# EAGLE board sensro (EAGLE 7.7.0)
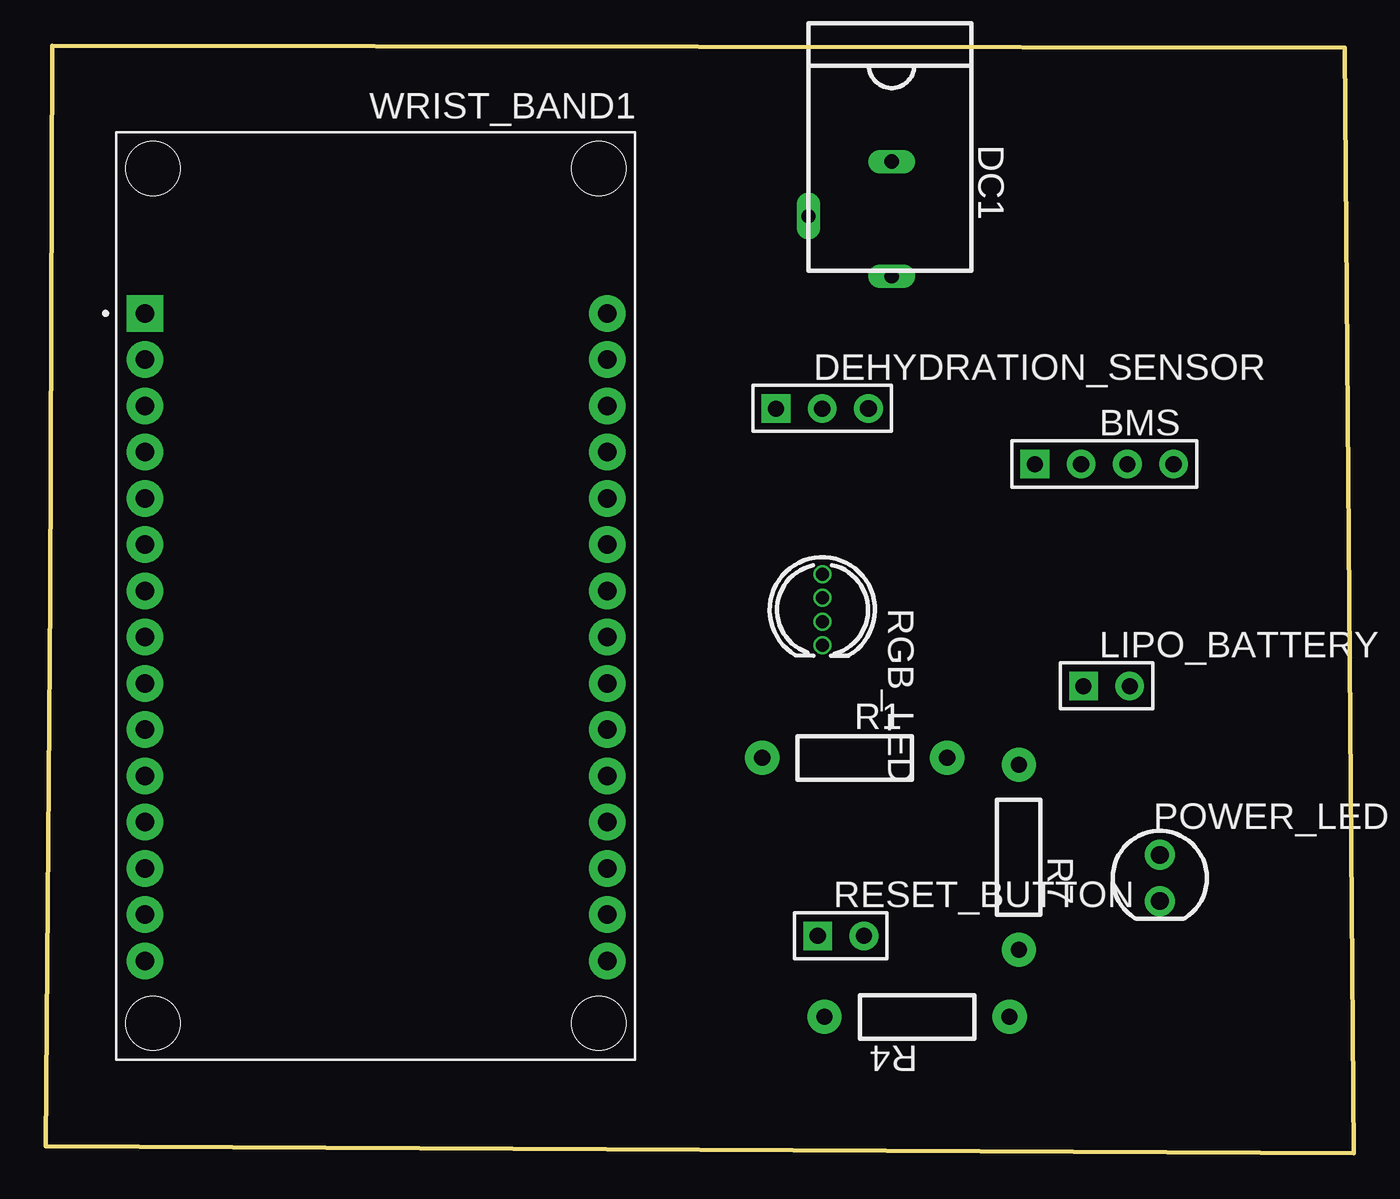
[diagram p0: board, top side]
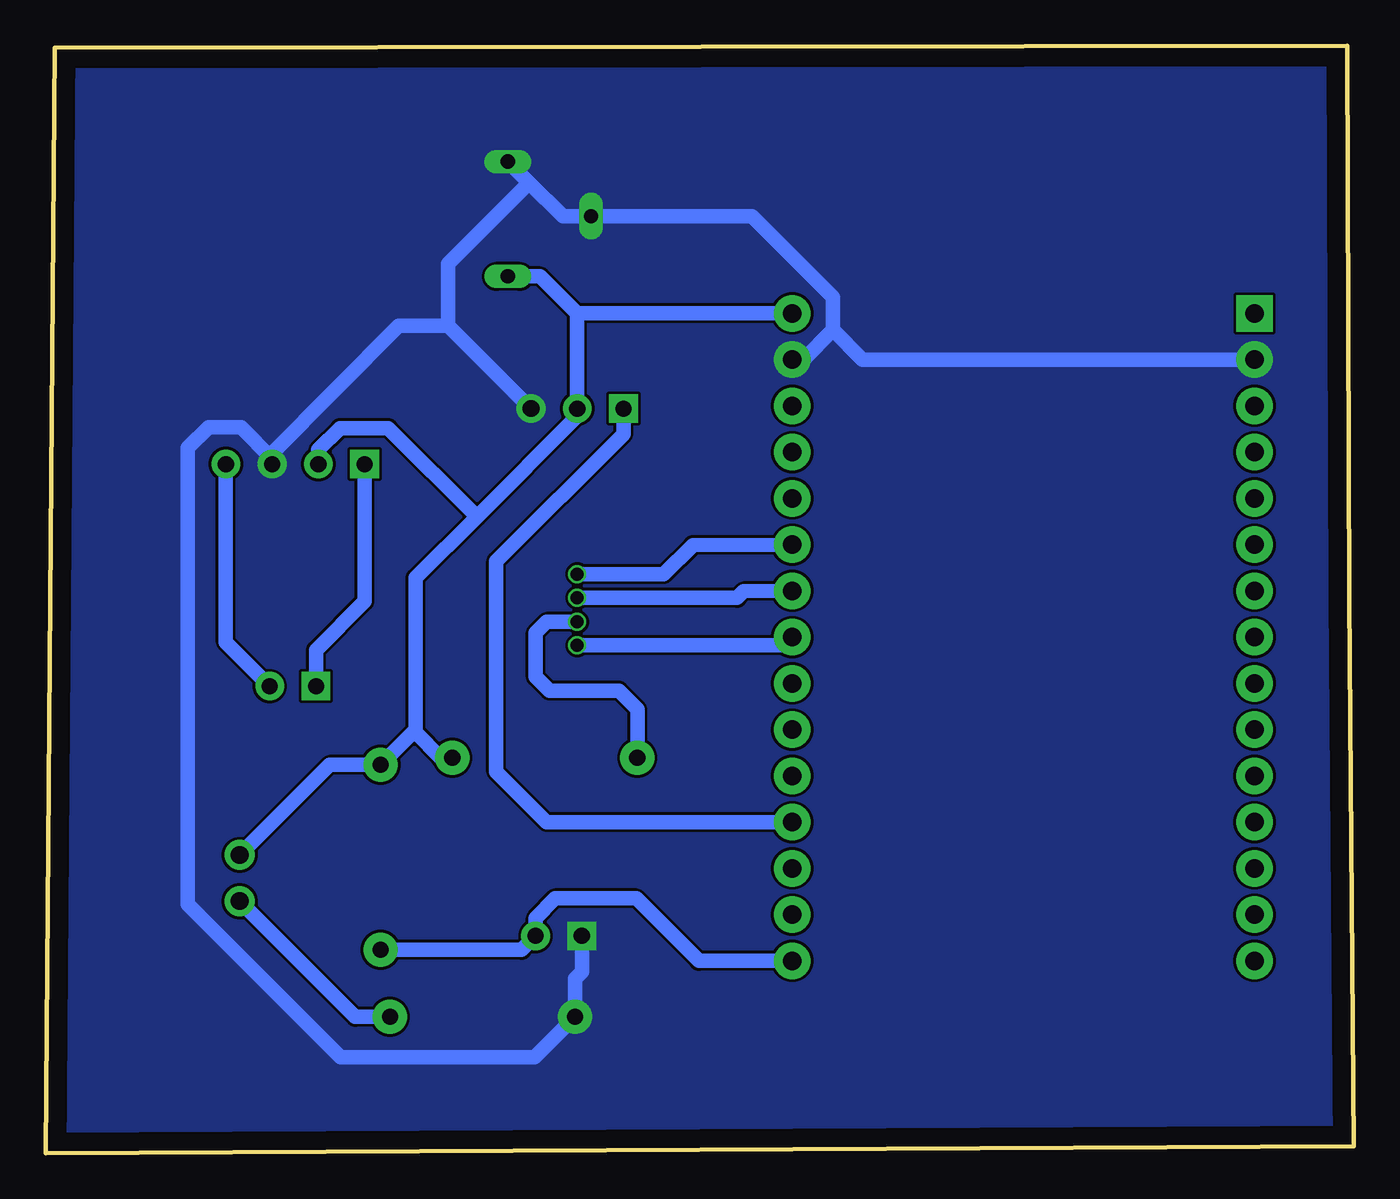
[diagram p1: board, bottom side, seen from below]

Size 71.88 x 60.83 mm. Coordinates in mm from the lower left corner, seen from the top.
Outline: 0.25,30.48 0.38,60.83 71.37,60.71 71.88,0 0,0.38 0.25,30.48
Copper layers (1*16): Top 0.035mm / dielectric 1.5mm / Bottom 0.035mm
Design rules "PCB_PCB_dehydration(sensor)_2023-07-20": minimum track width 6mil, minimum drill 0.35mm, track to track 6mil, track to pad 6mil, pad to pad 6mil, via to via 6mil, smd to smd 6mil, copper to edge 40mil, drill to drill 6mil, minimum pad ring 0mil, minimum via ring 0mil, stop-mask expansion 4mil, vias tented up to drill 0mil, thermal gap 10mil

## Footprints (pad centres in the part's own frame; a part is rotated, then mirrored left to right if it is on the bottom)
HDR-F-2.54_1X4_1PRIMARY = drill 0.889 pad 1.575 square: 1 -3.81,0 | drill 0.889 pad 1.575: 2 -1.27,0; 3 1.27,0; 4 3.81,0
DC-5020_1PRIMARY = drill 0.787 pad 1.295 long: 1 3.15,2.286; 2 -3.15,2.286; 3 -0.152,-2.286
HDR-F-2.54_1X3_1PRIMARY = drill 0.889 pad 1.575 square: 1 -2.54,0 | drill 0.889 pad 1.575: 2 0,0 | drill 0.914 pad 1.575: 3 2.54,0
HDR-F-2.54_1X2_1PRIMARY = drill 0.889 pad 1.575 square: 1 -1.27,0 | drill 0.889 pad 1.575: 2 1.27,0
LED-TH_BD5.0_BLUE_1PRIMARY = drill 0.965 pad 1.651: 1 0,1.27; 2 0,-1.27
R_AXIAL-0.4_1PRIMARY = drill 0.889 pad 1.88: 1 -5.08,0; 2 5.08,0
LED-TH_4P-BD5.8-P1.30_1PRIMARY = drill 0.711 pad 0.991: 1 1.956,0; 2 0.66,0; 3 -0.66,0; 4 -1.956,0
MODULE_ESP32_DEVKIT_V1_1PRIMARY = drill 1.016 pad 2.007 square: 1 -12.7,15.519 | drill 1.016 pad 2.007: 2 -12.7,12.979; 3 -12.7,10.439; 4 -12.7,7.899; 5 -12.7,5.359; 6 -12.7,2.819; 7 -12.7,0.279; 8 -12.7,-2.261; 9 -12.7,-4.801; 10 -12.7,-7.341; 11 -12.7,-9.881; 12 -12.7,-12.421; 13 -12.7,-14.961; 14 -12.7,-17.501; 15 -12.7,-20.041; 16 12.7,-20.041; 17 12.7,-17.501; 18 12.7,-14.961; 19 12.7,-12.421; 20 12.7,-9.881; 21 12.7,-7.341; 22 12.7,-4.801; 23 12.7,-2.261; 24 12.7,0.279; 25 12.7,2.819; 26 12.7,5.359; 27 12.7,7.899; 28 12.7,10.439; 29 12.7,12.979; 30 12.7,15.519

## Placement (x,y rotation side)
BMS  HDR-F-2.54_1x4  [HDR-F-2.54_1X4_1PRIMARY]  58.17,37.85 0 top
DC1  DC005-2.0MM  [DC-5020_1PRIMARY]  44.2,51.31 270 top
DEHYDRATION_SENSOR  HDR-F-2.54_1x3  [HDR-F-2.54_1X3_1PRIMARY]  42.67,40.89 0 top
LIPO_BATTERY  HDR-F-2.54_1x2  [HDR-F-2.54_1X2_1PRIMARY]  58.29,25.65 0 top
POWER_LED  LED-TH-5mm_B  [LED-TH_BD5.0_BLUE_1PRIMARY]  61.21,15.11 0 top
R1  220  [R_AXIAL-0.4_1PRIMARY]  44.45,21.72 0 top
R4  220  [R_AXIAL-0.4_1PRIMARY]  47.88,7.49 180 top
R7  10k  [R_AXIAL-0.4_1PRIMARY]  53.47,16.26 270 top
RESET_BUTTON  HDR-F-2.54_1x2  [HDR-F-2.54_1X2_1PRIMARY]  43.69,11.94 0 top
RGB_LED  f5_RGB_Transparent  [LED-TH_4P-BD5.8-P1.30_1PRIMARY]  42.67,29.84 270 top
WRIST_BAND1  ESP32-DEVKIT-V1  [MODULE_ESP32_DEVKIT_V1_1PRIMARY]  18.16,30.61 0 top

## Library data of the parts
BMS DC1 DEHYDRATION_SENSOR LIPO_BATTERY POWER_LED R1 R4 R7 RESET_BUTTON RGB_LED WRIST_BAND1 = PCB_PCB_dehydration(sensor)_2023-07-20

## Nets
3.7V: BMS.2 DC1.1 DEHYDRATION_SENSOR.2 POWER_LED.1 R1.2 R7.1 WRIST_BAND1.30
BMS_1: BMS.1 LIPO_BATTERY.1
BMS_4: BMS.4 LIPO_BATTERY.2
DEHYDRATION: DEHYDRATION_SENSOR.1 WRIST_BAND1.19
GND: BMS.3 DC1.2 DC1.3 DEHYDRATION_SENSOR.3 R4.2 RESET_BUTTON.1 WRIST_BAND1.2 WRIST_BAND1.29
OUTPUT_LED1: RGB_LED.1 WRIST_BAND1.23
OUTPUT_LED2: RGB_LED.3 WRIST_BAND1.24
OUTPUT_LED3: RGB_LED.4 WRIST_BAND1.25
POWER_LED_2: POWER_LED.2 R4.1
R1_1: R1.1 RGB_LED.2
RESET1: R7.2 RESET_BUTTON.2 WRIST_BAND1.16
WRIST_BAND1_1: WRIST_BAND1.1
WRIST_BAND1_3: WRIST_BAND1.3
WRIST_BAND1_4: WRIST_BAND1.4
WRIST_BAND1_5: WRIST_BAND1.5
WRIST_BAND1_6: WRIST_BAND1.6
WRIST_BAND1_7: WRIST_BAND1.7
WRIST_BAND1_8: WRIST_BAND1.8
WRIST_BAND1_9: WRIST_BAND1.9
WRIST_BAND1_10: WRIST_BAND1.10
WRIST_BAND1_11: WRIST_BAND1.11
WRIST_BAND1_12: WRIST_BAND1.12
WRIST_BAND1_13: WRIST_BAND1.13
WRIST_BAND1_14: WRIST_BAND1.14
WRIST_BAND1_15: WRIST_BAND1.15
WRIST_BAND1_17: WRIST_BAND1.17
WRIST_BAND1_18: WRIST_BAND1.18
WRIST_BAND1_20: WRIST_BAND1.20
WRIST_BAND1_21: WRIST_BAND1.21
WRIST_BAND1_22: WRIST_BAND1.22
WRIST_BAND1_26: WRIST_BAND1.26
WRIST_BAND1_27: WRIST_BAND1.27
WRIST_BAND1_28: WRIST_BAND1.28

## Tracks (layer width: path | path; a pad name or v marks a point on that pad's centre or on a via)
3.7V
  Bottom 0.8: 42.67,46.13 44.7,48.16 DC1.1 | 42.67,46.13 DEHYDRATION_SENSOR.2 42.67,40.49 48.18,34.95 | WRIST_BAND1.30 42.67,46.13 | 51.56,23.11 51.56,31.6 48.18,34.95 | BMS.2 56.9,38.63 55.7,39.83 53.06,39.83 48.18,34.95 | 51.56,23.11 51.69,23.11 R7.1 56.26,21.34 POWER_LED.1 | R1.2 50.19,21.72 51.56,23.11
BMS_1
  Bottom 0.8: LIPO_BATTERY.1 57.02,27.64 54.36,30.3 BMS.1
BMS_4
  Bottom 0.8: LIPO_BATTERY.2 61.98,28.07 BMS.4
DEHYDRATION
  Bottom 0.8: WRIST_BAND1.19 44.35,18.19 47.12,20.95 47.12,32.51 40.13,39.5 DEHYDRATION_SENSOR.1
GND
  Bottom 0.8: 28.63,45.21 28.63,47.02 33.07,51.46 DC1.3 43.46,51.46 45.31,53.29 | WRIST_BAND1.29 30.25,43.59 28.63,45.21 | WRIST_BAND1.2 27,43.59 28.63,45.21 | DEHYDRATION_SENSOR.3 49.76,45.44 | 45.31,53.29 49.76,48.84 49.76,45.44 | 49.76,45.44 52.48,45.44 59.44,38.46 BMS.3 59.44,38.15 61.14,39.88 62.92,39.88 64.08,38.73 64.08,13.67 55.68,5.28 45.01,5.28 R4.2 42.8,9.58 42.42,9.96 RESET_BUTTON.1 | 45.31,53.29 DC1.2
  pour Bottom (no thermals): -5.97,67.06 -5.97,-0.89 -6.73,-1.65 79.88,-1.65 81.53,0 81.53,58.55 75.95,64.13 75.95,64.26
OUTPUT_LED1
  Bottom 0.8: RGB_LED.1 31.32,27.89 WRIST_BAND1.23
OUTPUT_LED2
  Bottom 0.8: RGB_LED.3 33.88,30.5 33.53,30.86 WRIST_BAND1.24
OUTPUT_LED3
  Bottom 0.8: RGB_LED.4 37.92,31.8 36.32,33.4 WRIST_BAND1.25
POWER_LED_2
  Bottom 0.8: R4.1 54.86,7.49 POWER_LED.2
R1_1
  Bottom 0.8: RGB_LED.2 44.35,29.19 44.96,28.58 44.96,26.16 44.2,25.4 40.39,25.4 39.37,24.38 R1.1
RESET1
  Bottom 0.8: WRIST_BAND1.16 35.99,10.57 39.42,14 43.89,14 44.96,12.9 RESET_BUTTON.2 45.72,11.18 R7.2